# EAGLE board Analog_1 (EAGLE 8.2.1)
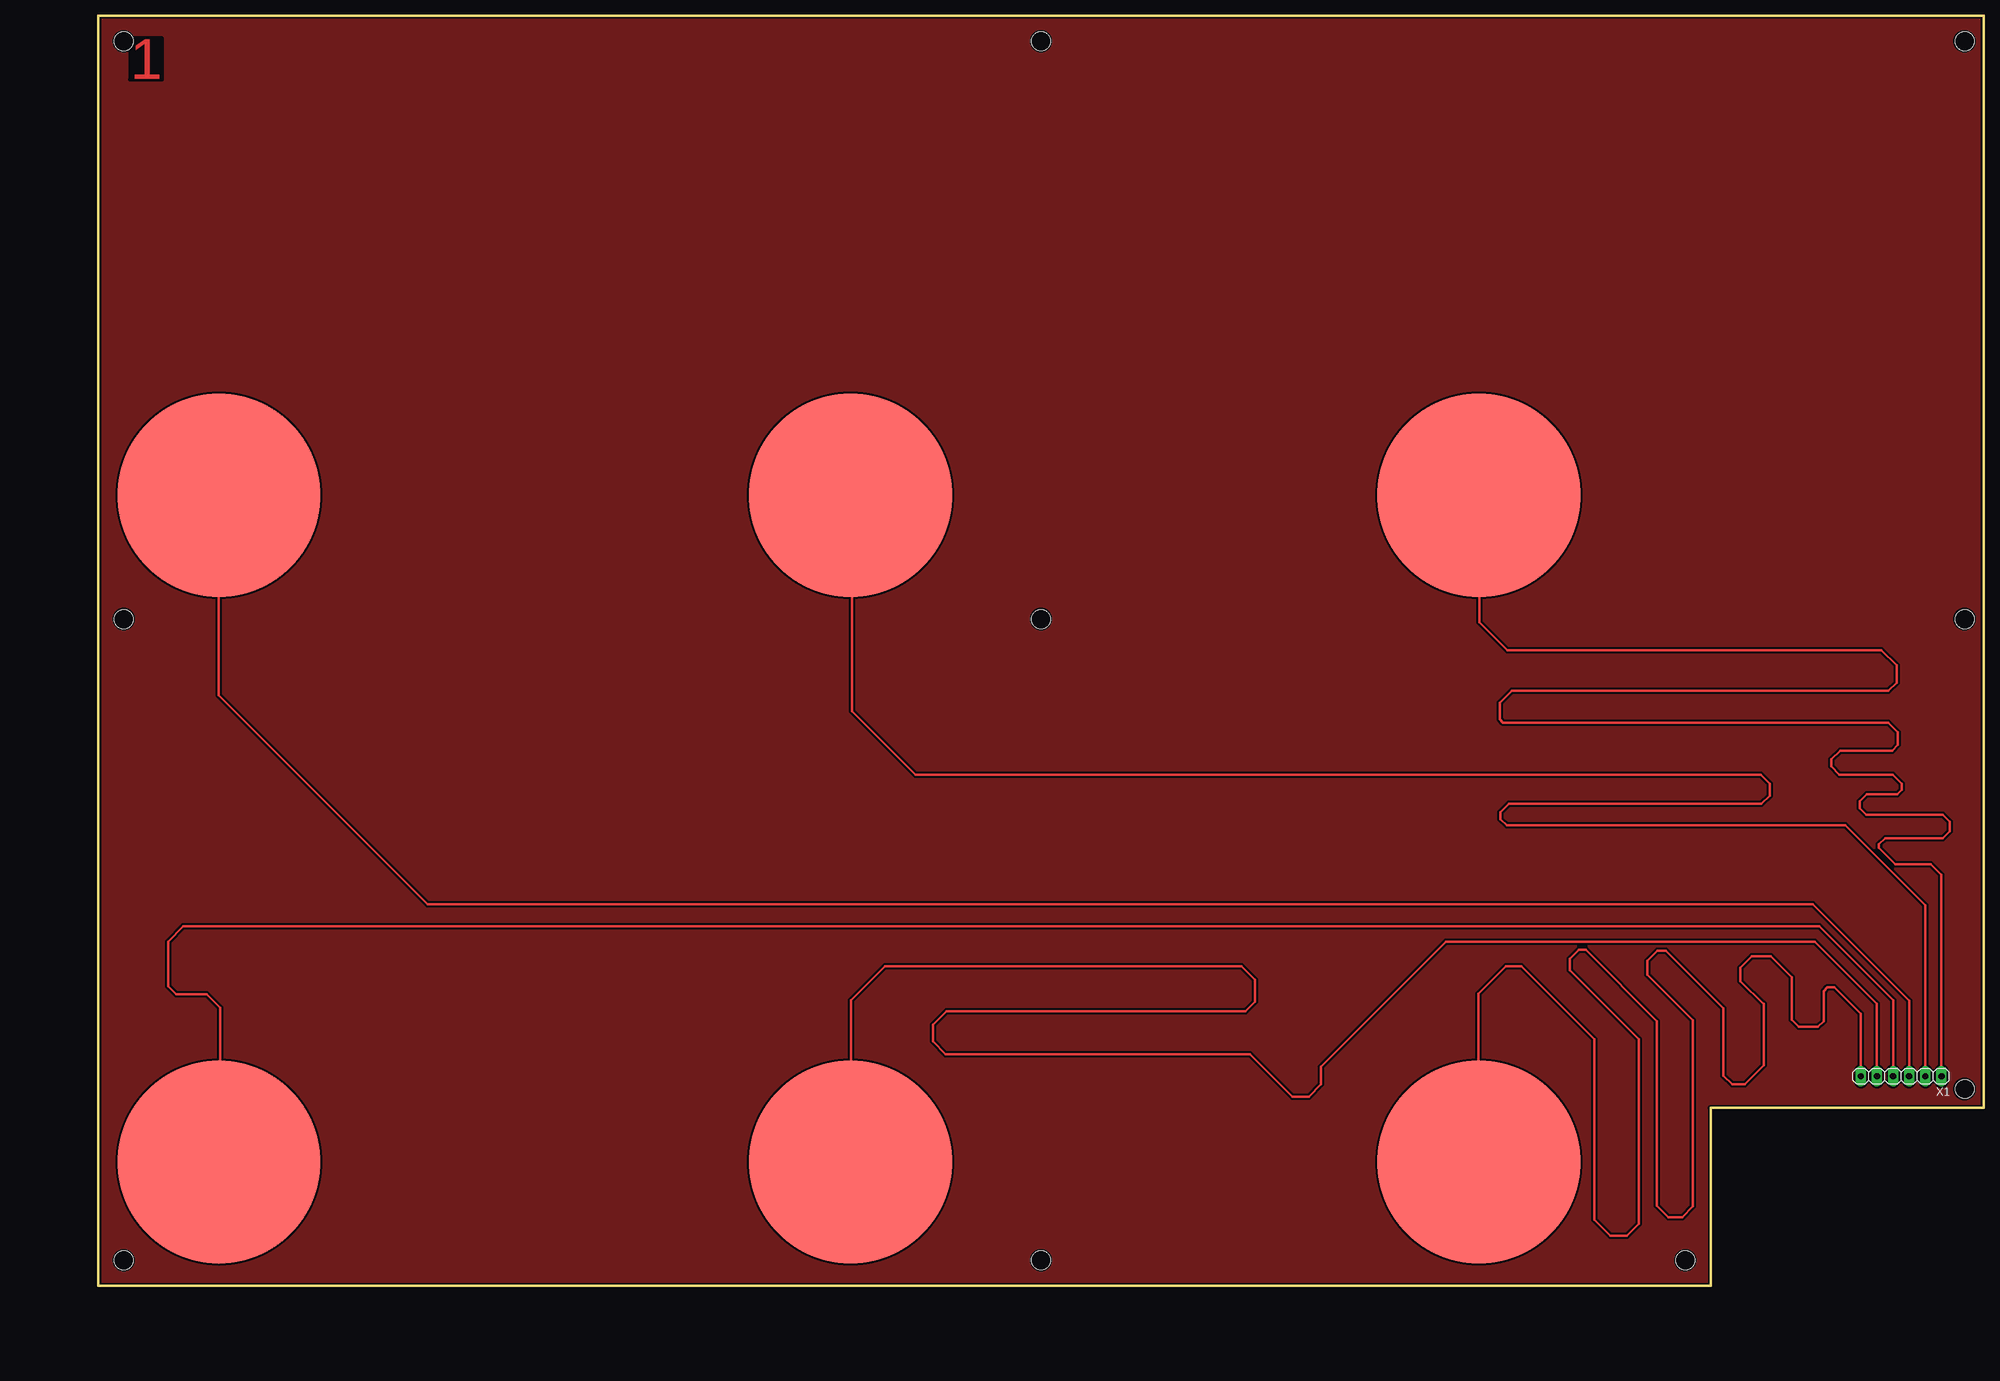
[diagram p0: board, top side]

Size 297 x 200 mm. Coordinates in mm from the lower left corner, seen from the top.
Outline: 0,200 0,0 254,0 254,28 297,28 297,200 0,200
Copper layers 16: Bottom 0.105mm
Design rules "eC_1Layer_PClass3_BaseCopperO105 *": minimum track width 0.25mm, minimum drill 0.35mm, track to track 0.3mm, track to pad 0.3mm, pad to pad 0.3mm, via to via 0.3mm, smd to smd 0mil, copper to edge 0.25mm, drill to drill 0.35mm, minimum pad ring 0.3mm, minimum via ring 0.3mm, stop-mask expansion 0mil, vias tented up to drill 0.45mm, thermal gap 0.2mm
Holes 3 mm at 4,4 4,196 294,196 294,31 250,4 4,105 294,105 148.5,196 148.5,4 148.5,105

## Footprints (pad centres in the part's own frame; a part is rotated, then mirrored left to right if it is on the bottom)
PAD = smd 32 x 32: P$1 0,0
1X06 = drill 1.016 long: 1 -6.35,0; 2 -3.81,0; 3 -1.27,0; 4 1.27,0; 5 3.81,0; 6 6.35,0

## Placement (x,y rotation side)
1  [PAD]  19,124.5 0 top
E$1  [PAD]  19,19.5 0 top
E$3  [PAD]  118.5,124.5 0 top
E$4  [PAD]  118.5,19.5 0 top
E$5  [PAD]  217.5,124.5 0 top
E$6  [PAD]  217.5,19.5 0 top
X1  [1X06]  284,33 180 top

## Library data of the parts
1 E$1 E$3-E$6 = pad
X1 = pinhead

## Nets
S$1: 1.P$1

## Tracks (layer width: path | path; a pad name or v marks a point on that pad's centre or on a via)
S$1
  Top 0.406: 1.P$1 19,93 51.9,60.1 270.1,60.1 285.28,44.92 285.28,32.96
S$2
  Top 0.406: 118.7,124.4 118.7,90.5 128.7,80.5 261.9,80.5 263.3,79.1 263.3,77.2 262,75.9 222.2,75.9 220.9,74.6 220.9,73.5 221.9,72.5 275.2,72.5 287.8,59.9 287.8,33
S$3
  Top 0.406: 217.6,124.4 217.6,104.5 222,100.1 280.9,100.1 283.3,97.7 283.3,95 282,93.7 222.7,93.7 220.8,91.8 220.8,89.2 221.3,88.7 282,88.7 283.5,87.2 283.5,85.2 282.6,84.3 274.4,84.3 273,82.9 273,81.8 274.3,80.5 282.7,80.5 284.1,79.1 284.1,78.1 283.4,77.4 278.6,77.4 277.5,76.3 277.5,75.2 278.5,74.2 290.6,74.2 291.7,73.1 291.7,71.6 290.6,70.5 281.5,70.5 280.5,69.5 280.5,69 283.1,66.4 288.7,66.4 290.33,64.77 290.33,62.37 290.33,62.28 290.33,32.99
S$4
  Top 0.406: 118.6,19.5 118.6,45 123.9,50.3 180.1,50.3 182.2,48.2 182.2,44.7 180.7,43.2 133.6,43.2 131.5,41.1 131.5,38.5 133.5,36.5 181.4,36.5 188.1,29.8 190.7,29.8 192.6,31.7 192.6,34.5 212.3,54.2 270.4,54.2 280.2,44.4 280.2,33
S$5
  Top 0.406: 19.2,20.5 19.2,43.8 17.1,45.9 12.3,45.9 11,47.2 11,54.2 13.4,56.6 16.6,56.6 16.7,56.6 271.1,56.6 282.75,44.95 282.75,33.01
S$6
  Top 0.406: 217.4,19.4 217.4,46 221.7,50.3 224.2,50.3 235.7,38.8 235.7,10.4 238.2,7.9 240.8,7.9 242.7,9.8 242.7,38.8 231.8,49.7 231.8,51.5 233.2,52.9 234.3,52.9 245.5,41.7 245.5,12.6 247.3,10.8 249.5,10.8 251.2,12.5 251.2,41.8 244,49 244,51.2 245.6,52.8 246.9,52.8 256,43.7 256,33.1 257.4,31.7 259.4,31.7 262.4,34.7 262.4,44.3 | 262.4,44.3 262.4,44.4 | 262.4,44.3 258.7,48 258.7,50.1 260.5,51.9 263.5,51.9 266.8,48.6 266.8,41.9 267.9,40.8 270.9,40.8 271.8,41.7 271.8,46.4 272.4,47 273.5,47 277.65,42.85 277.65,32.97
S$7
  pour Top: 0,0 254,0 254,28 297,28 297,200 0,200

## Text on the board
Top: 1